# EAGLE board Nusbio.smd (EAGLE 7.5.0)

Size 28 x 41 mm. Coordinates in mm from the lower left corner, seen from the top.
Outline: 27,40 1,40
Outline: 2,0 arc-90 0,2 0,39 arc-90 2,41 26,41 arc-90 28,39 28,2 arc-90 26,0 2,0
Copper layers (1*16): Top 0.035mm / dielectric 1.5mm / Bottom 0.035mm
Design rules "default": minimum track width 10mil, minimum drill 24mil, track to track 8mil, track to pad 8mil, pad to pad 8mil, via to via 8mil, smd to smd 8mil, copper to edge 40mil, drill to drill 8mil, minimum pad ring 10mil, minimum via ring 8mil, stop-mask expansion 4mil, vias tented up to drill 0mil, thermal gap 10mil
Holes 3.5 mm at 4,7 24,7 24,32 4,32

## Footprints (pad centres in the part's own frame; a part is rotated, then mirrored left to right if it is on the bottom)
EIA3216 = smd 1.4 x 1.6: A 1.4,0; C -1.4,0
C1206 = smd 1.6 x 1.8: 1 -1.4,0; 2 1.4,0
PTC-1206 = smd 1 x 1.8: 1 -1.4,0; 2 1.4,0
CHIPLED_0805 = smd 1.2 x 1.2: A 0,-1.05; C 0,1.05
R0805 = smd 1.1 x 1.4: 1 -1,0; 2 1,0
SOLDERJUMPER_REFLOW = smd 1.168 x 1.6: 1 -0.762,0; 2 0.762,0
SSOP20_L = smd 0.381 x 1.143: 1 -2.857,-2.68; 2 -2.223,-2.68; 3 -1.587,-2.68; 4 -0.953,-2.68; 5 -0.318,-2.68; 6 0.318,-2.68; 7 0.953,-2.68; 8 1.587,-2.68; 9 2.223,-2.68; 10 2.857,-2.68; 11 2.857,2.68; 12 2.223,2.68; 13 1.587,2.68; 14 0.953,2.68; 15 0.318,2.68; 16 -0.318,2.68; 17 -0.953,2.68; 18 -1.587,2.68; 19 -2.223,2.68; 20 -2.857,2.68
1X10-BIG = drill 1.016 pad 1.778 octagon: 1 -11.43,0; 2 -8.89,0; 3 -6.35,0; 4 -3.81,0; 5 -1.27,0; 6 1.27,0; 7 3.81,0; 8 6.35,0; 9 8.89,0; 10 11.43,0
USB-FEMALE-A-PTH = drill 0.9: D+ 5.9,1.3; D- 7.9,1.3; GND 3.4,1.3; VBUS 10.4,1.3 | drill 3: GND@1 13.5,4; GND@2 0.3,4
1X03 = drill 1.016: 1 -2.54,0; 2 0,0; 3 2.54,0

## Placement (x,y rotation side)
C1_10UF  10uF  [EIA3216]  17,15 180 top
C2_0.1UF  [C1206]  11,19 0 top
C3_47PF_DP  [C1206]  5,15 180 top
C4_47PF_DM  [C1206]  5,19 180 top
C5_0.1UF  [C1206]  11,15 0 top
FUSE500MA1  PTCSMD  [PTC-1206]  17,19 0 top
LEDPWR_1  [CHIPLED_0805]  25.5,24.5 180 top
R_DM_27  [R0805]  23,19 180 top
R_DP_27  [R0805]  23,15 180 top
RPWR_1K_1  [R0805]  23.5,24.5 90 top
SB_3V  [SOLDERJUMPER_REFLOW]  8.5,23 90 top
SB_5V  [SOLDERJUMPER_REFLOW]  8.5,27 90 top
U1  FTS31XS-U  [SSOP20_L]  15.5,26 180 top
U$1  PINHD-1X10  [1X10-BIG]  14,38.5 180 top
USB_FEMALE  USB  [USB-FEMALE-A-PTH]  20.9,6.9 180 top
VCCIO_3V_5V  [1X03]  3,24.7 90 top

## Library data of the parts
C1_10UF = SparkFun-Capacitors; PROD_ID: CAP-00811
C2_0.1UF C3_47PF_DP C4_47PF_DM C5_0.1UF LEDPWR_1 R_DM_27 R_DP_27 RPWR_1K_1 U$1 VCCIO_3V_5V = adafruit
FUSE500MA1 = SparkFun-PowerIC; PROD_ID: RES-11150
SB_3V SB_5V = microbuilder
U1 = SparkFun-DigitalIC; PROD_ID: IC-11524
USB_FEMALE = STUNTAZ

## Nets
GND: C1_10UF.C C2_0.1UF.2 C3_47PF_DP.1 C4_47PF_DM.1 C5_0.1UF.2 RPWR_1K_1.2 U1.6 U1.16 U$1.10 USB_FEMALE.GND
N$1: FUSE500MA1.1 U$1.9
N$2: C5_0.1UF.1 SB_3V.2 U1.13 VCCIO_3V_5V.1
N$3: LEDPWR_1.C RPWR_1K_1.1
N$4: R_DM_27.2 U1.12
N$5: R_DP_27.2 U1.11
N$6: U1.20 U$1.6
N$7: U1.7 U$1.2
N$8: U1.5 U$1.1
N$9: U1.1 U$1.3
N$10: U1.8 U$1.4
N$11: U1.9 U$1.5
N$12: U1.4 U$1.7
N$13: U1.2 U$1.8
N$14: FUSE500MA1.2 SB_3V.1 SB_5V.2 U1.3 U1.14 VCCIO_3V_5V.2
N$15: C3_47PF_DP.2 R_DP_27.1 USB_FEMALE.D+
N$16: C4_47PF_DM.2 R_DM_27.1 USB_FEMALE.D-
N$17: C1_10UF.A C2_0.1UF.1 LEDPWR_1.A SB_5V.1 U1.15 USB_FEMALE.VBUS VCCIO_3V_5V.3

## Tracks (layer width: path | path; a pad name or v marks a point on that pad's centre or on a via)
GND  (9 unrouted)
N$1  (1 unrouted)
N$2  (3 unrouted)
N$3  (1 unrouted)
N$4  (1 unrouted)
N$5  (1 unrouted)
N$6  (1 unrouted)
N$7  (1 unrouted)
N$8  (1 unrouted)
N$9  (1 unrouted)
N$10  (1 unrouted)
N$11  (1 unrouted)
N$12  (1 unrouted)
N$13  (1 unrouted)
N$14  (5 unrouted)
N$15  (2 unrouted)
N$16  (2 unrouted)
N$17  (6 unrouted)

## Text on the board
tNames: GND | VCC | 7 | 6 | 5 | 4 | 3 | 2 | 1 | 0 | Nusbio | Nusbio | G1 | 5V | + | 3V | + | MadeInTheUSB.net | FT-2016-02 | VCC | GND | PCBv11
bNames: Nusbio | MadeInTheUSB.net